# Altium PCB PCB1.PcbDoc
Units mm, origin at the board's own origin, x right, y up, seen from the top; angles counter-clockwise.
Board outline 57 x 66 mm, 2 copper layers (Top Layer, Bottom Layer); 36 components, 30 nets, 109 pads, 6 vias.
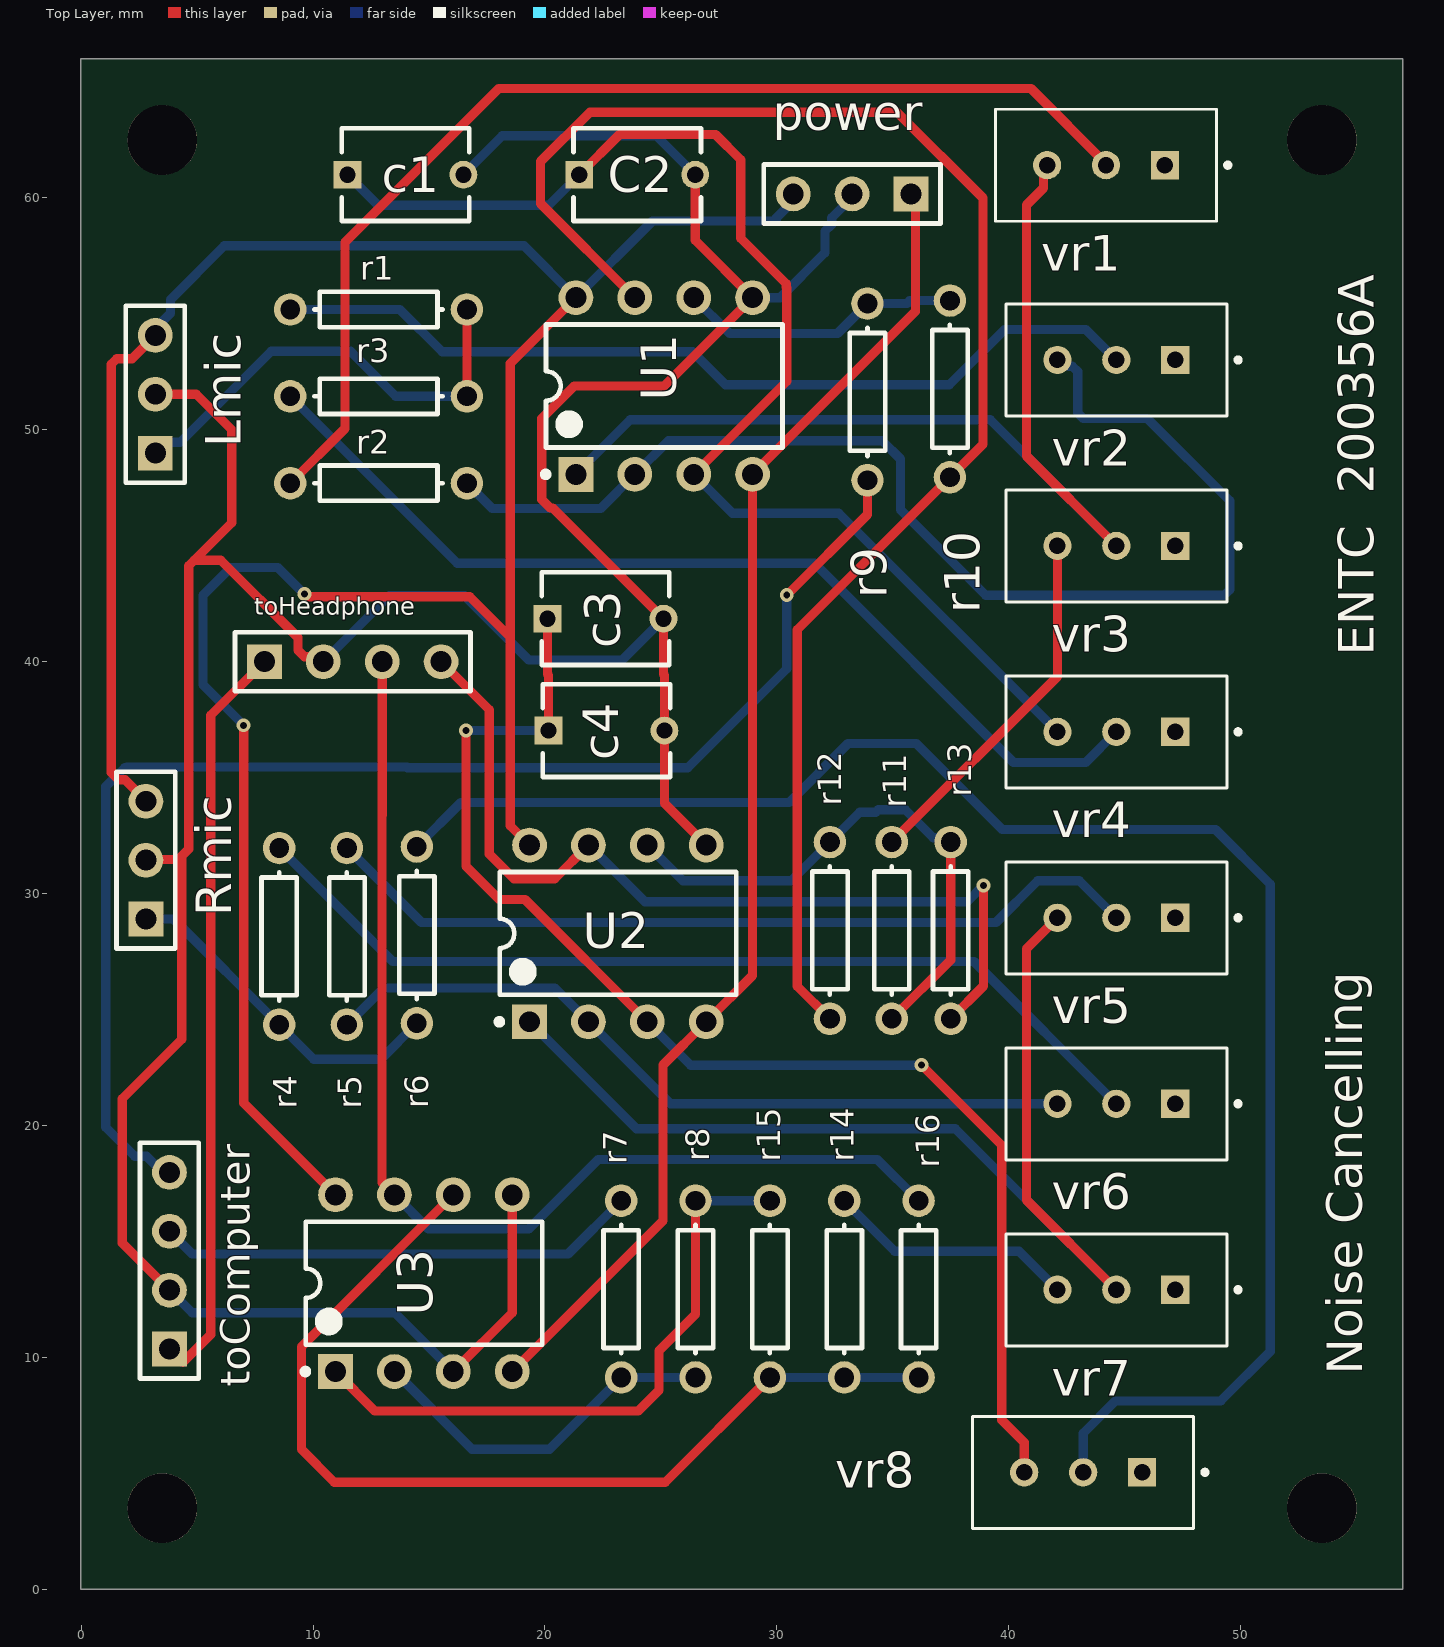
[diagram p0: Top Layer view]
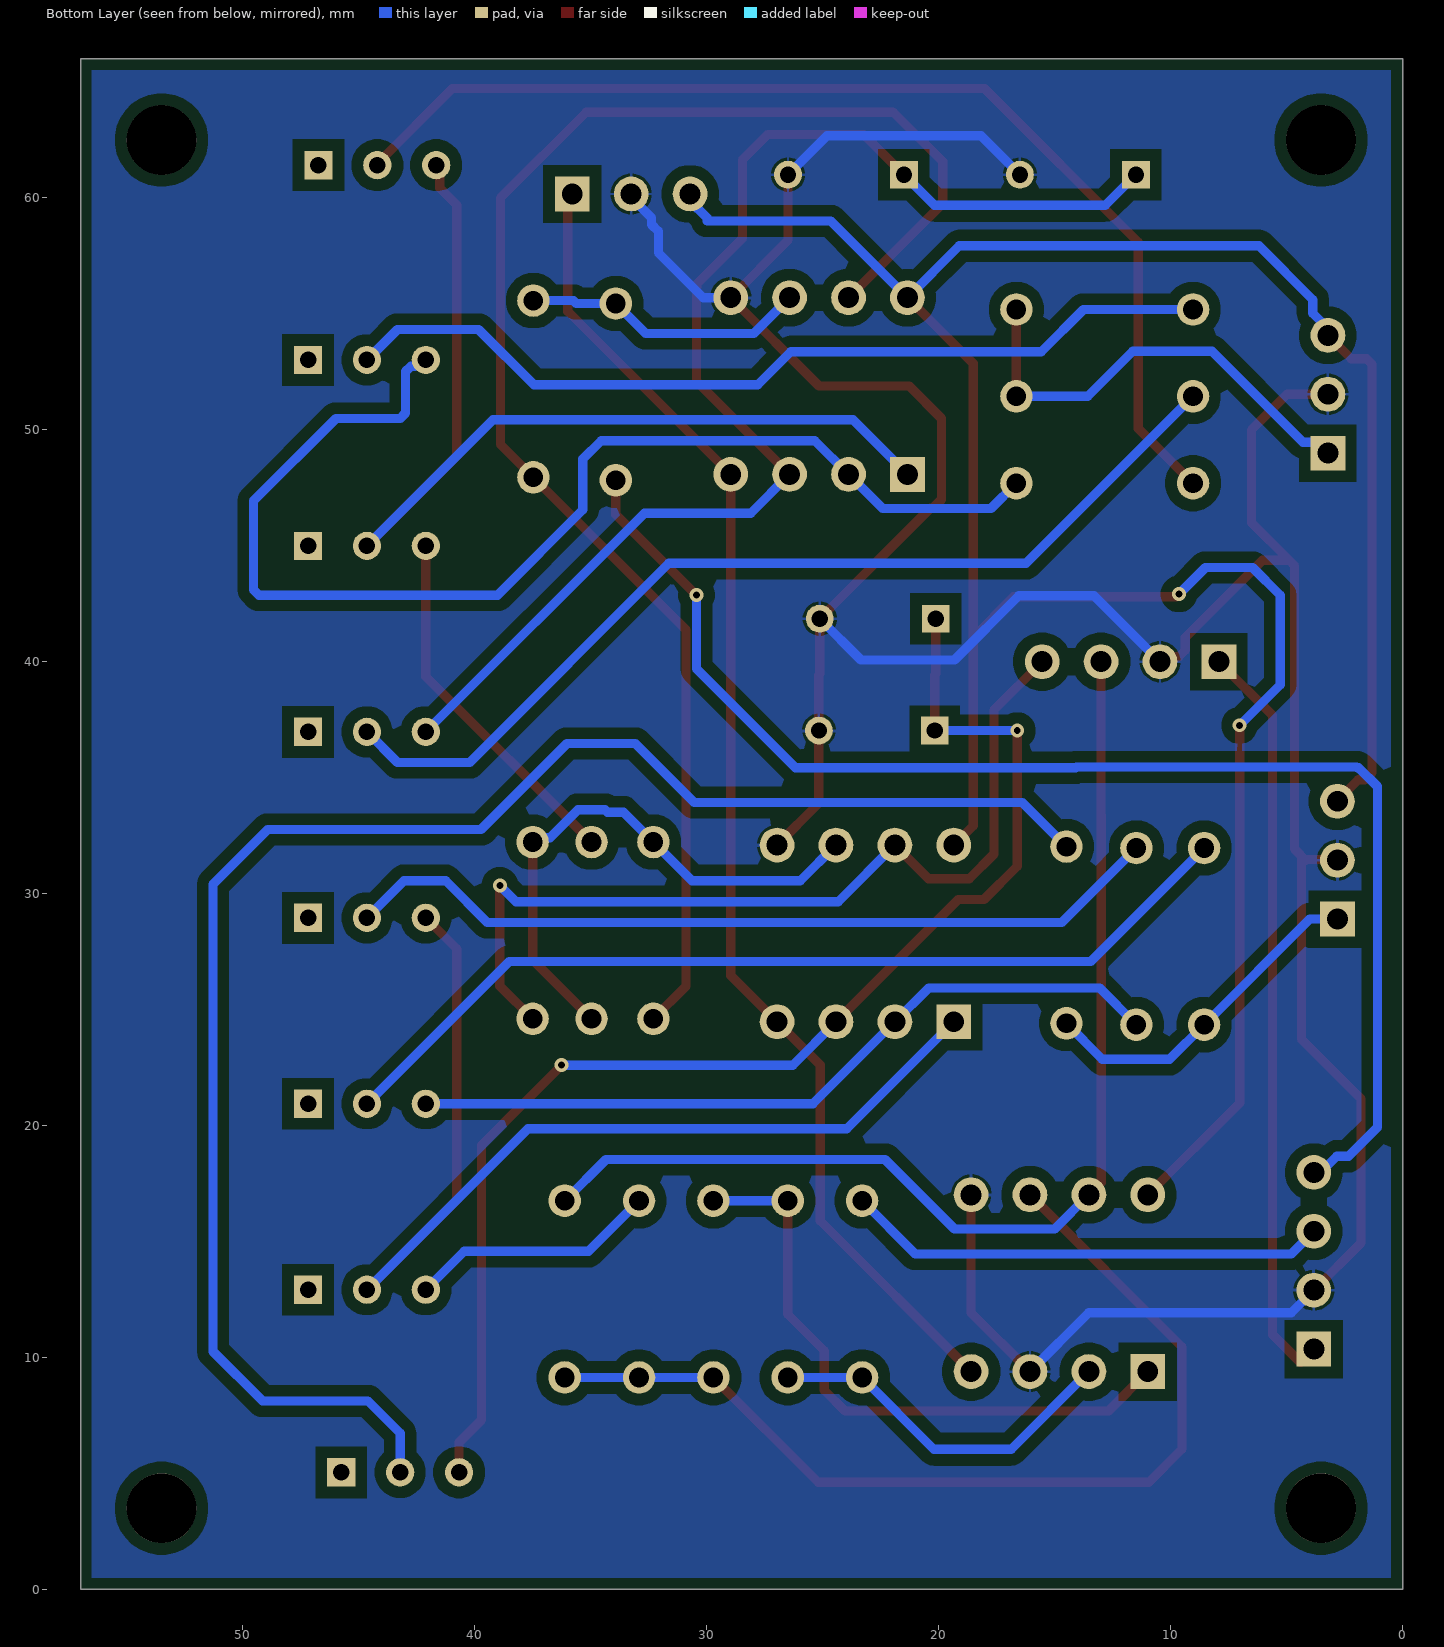
[diagram p1: Bottom Layer view, seen from below]

## Layer stack, top to bottom
Top Solder: solder mask 0.0102, Solder Resist, Dk 3.5
Top Layer: signal copper 0.0356
Dielectric 1: dielectric 0.32, FR-4, Dk 4.8
Bottom Layer: signal copper 0.0356
Bottom Solder: solder mask 0.0102, Solder Resist, Dk 3.5

## Board outline
-0.016,0.005 -0.016,66.005 56.984,66.005 56.984,0.005

## Design rules (kind name [scope] priority, off if disabled: settings)
BoardOutlineClearance [All] p1: gap=0.2 ignorepadtopadclearanceinfootprint=FALSE
Clearance [All] p1: gap=0.5 ignorepadtopadclearanceinfootprint=FALSE
ComponentClearance [All] p1: gap=0.127 collisioncheckmode=3 verticalgap=0.127 showdistances=TRUE
DiffPairsRouting [All] p1: maxlimit=0.254 minlimit=0.127 mostfreqgap=0.127 toplayer_minwidth=0.127 toplayer_maxwidth=25.4 toplayer_prefwidth=0.127 bottomlayer_minwidth=0.127 bottomlayer_maxwidth=25.4 bottomlayer_prefwidth=0.127 maxuncoupledlength=12.7
Height [All] p1: minheight=0 maxheight=1816.048 prefheight=12.7
HoleSize [All] p1: absolutevalues=TRUE maxlimit=6.3 minlimit=0.3 maxpercent=80.000 minpercent=20.000
HoleToHoleClearance [All] p1: gap=0.25 allowstackedmicrovias=FALSE
MinimumAnnularRing [All] p1: minimumring=0.076
MinimumSolderMaskSliver [All] p1: minsoldermaskwidth=0
PlaneClearance [All] p1: clearance=0.127
PlaneConnect PlaneConnectPowerPads [InPadClass('PowerPads')] p1: planeconnectstyle=Direct reliefexpansion=0.508 reliefentries=4 reliefconductorwidth=0.254 reliefairgap=0.254
PlaneConnect [All] p2: pad.planeconnectstyle=Relief pad.reliefexpansion=0.3 pad.reliefentries=4 pad.reliefconductorwidth=0.127 pad.reliefairgap=0.127 via.planeconnectstyle=Direct via.reliefexpansion=0.3 via.reliefentries=4 via.reliefconductorwidth=0.127 via.reliefairgap=0.127
PolygonConnect PolygonConnectPowerPads [All vs (InPadClass('PowerPads'))] p1: connectstyle=Direct reliefconductorwidth=0.254 reliefentries=4 polygonreliefangle="90 Angle" airgapwidth=0.254
PolygonConnect [All] p2: thpad.connectstyle=Relief thpad.reliefconductorwidth=0.127 thpad.reliefentries=4 thpad.polygonreliefangle="90 Angle" thpad.airgapwidth=0.127 smdpad.connectstyle=Relief smdpad.reliefconductorwidth=0.127 smdpad.reliefentries=4 smdpad.polygonreliefangle="90 Angle" smdpad.airgapwidth=0.127 via.connectstyle=Direct via.reliefconductorwidth=0.127 via.reliefentries=4 via.polygonreliefangle="90 Angle" via.airgapwidth=0.127
RoutingVias [All] p1: holewidth=0.3 width=0.6 viastyle="Through Hole" minholewidth=0.3 minwidth=0.6 maxholewidth=0.6 maxwidth=6.6
SilkToSilkClearance [All] p1: silktosilkclearance=0
SilkToSolderMaskClearance [IsPad] p1: minsilkscreentomaskgap=0.127 clearancetoexposedcopper=TRUE
SolderMaskExpansion [All] p1: expansion=0.075 istentingtop=FALSE
Width [All] p1: maxlimit=0.5 minlimit=0.127 preferedwidth=0.4
20 further rules are at their usual default settings.

## Components (designator, comment, footprint, x,y, rotation, side; value= is the part's Value field where it differs from the comment)
c1 "1nF" FP-RCE3M1-MFG 13.984,61.005 r0 top (schematic designator C1)
C2 "1nF" FP-RCE3M1-MFG 23.984,61.005 r0 top
c3 "1nF" FP-RCE3M1-MFG 22.614,41.859 r0 top (schematic designator C3)
c4 "1nF" FP-RCE3M1-MFG 22.654,37.033 r0 top (schematic designator C4)
Lmic "Header 3" HDR1X3 3.2,48.997 r90 top
power "Header 3" HDR1X3 35.789,60.173 r180 top
r1 "5k" AXIAL-0.3 12.827,55.194 r180 top
r2 "5k" AXIAL-0.3 12.827,47.701 r180 top
r3 "10k" AXIAL-0.3 12.827,51.448 r180 top
r4 "5k" AXIAL-0.3 8.541,28.159 r90 top
r5 "5k" AXIAL-0.3 11.462,28.159 r90 top
r6 "10k" AXIAL-0.3 14.478,28.219 r270 top
r7 "10k" AXIAL-0.3 23.289,12.95 r270 top
r8 "10k" AXIAL-0.3 26.496,12.95 r90 top
r9 "10k" AXIAL-0.3 33.909,51.638 r90 top
r10 "10k" AXIAL-0.3 37.465,51.765 r270 top
r11 "1k" AXIAL-0.3 34.957,28.415 r270 top
r12 "10k" AXIAL-0.3 32.29,28.415 r90 top
r13 "10k" AXIAL-0.3 37.497,28.415 r270 top
r14 "1k" AXIAL-0.3 32.909,12.95 r270 top
r15 "10k" AXIAL-0.3 29.703,12.95 r270 top
r16 "10k" AXIAL-0.3 36.116,12.95 r90 top
Rmic "Header 3" HDR1X3 2.794,28.905 r90 top
toComputer "Header 4" HDR1X4 3.81,10.363 r90 top
toHeadphone "Header 4" HDR1X4 7.904,40.005 r0 top
U1 "TL072CP" P0008A 25.146,51.892 r90 top
U2 "TL072CP" P0008A 23.146,28.286 r90 top
U3 "TL072CP" P0008A 14.78,13.204 r90 top
vr1 "5k" TRIM_3296W-1-250 44.196,61.417 r180 top (schematic designator VR1)
vr2 "5k" TRIM_3296W-1-250 44.641,53.017 r180 top (schematic designator VR2)
vr3 "500k" TRIM_3296W-1-250 44.641,44.998 r180 top (schematic designator VR3)
vr4 "3k" TRIM_3296W-1-250 44.641,36.979 r180 top (schematic designator VR4)
vr5 "5k" TRIM_3296W-1-250 44.641,28.96 r180 top (schematic designator VR5)
vr6 "5k" TRIM_3296W-1-250 44.641,20.94 r180 top (schematic designator VR6)
vr7 "500k" TRIM_3296W-1-250 44.641,12.921 r180 top (schematic designator VR7)
vr8 "3k" TRIM_3296W-1-250 43.21,5.048 r180 top (schematic designator VR8)

## Footprints (in the part's own frame and the unit in brackets; to place one, negate y for a bottom-side part, rotate by r counter-clockwise, add the part's x,y. Pads: shape width x height; smd on the part's side, far side on the other; paste and mask are expansions set on the pad)
AXIAL-0.3 [mm] "Axial Device, Thru-Hole; 2 Leads; 0.3 in Pin Spacing"
  round 1.4 hole 0.85: 1(-3.81,0) 2(3.81,0)
  silkscreen extent -2.77,-0.76 2.77,0.76
FP-RCE3M1-MFG [mm]
  rect 1.2x1.2 hole 0.7 paste-1000 mask+0: 1(-2.5,0)
  round 1.2 hole 0.7 paste-1000 mask+0: 2(2.5,0)
  silkscreen extent -2.75,-2 2.75,2, body extent -3.2,-2.1 3.2,2.1, height 0.25
HDR1X3 [mm] "Connector; Header; 3 Position"
  rect 1.5x1.5 hole 0.9: 1(0,0)
  round 1.5 hole 0.9: 2(2.54,0) 3(5.08,0)
  silkscreen extent -1.27,-1.27 6.35,1.27
HDR1X4 [mm] "Connector; Header; 4 Position"
  rect 1.5x1.5 hole 0.9: 1(0,0)
  round 1.5 hole 0.9: 2(2.54,0) 3(5.08,0) 4(7.62,0)
  silkscreen extent -1.27,-1.27 8.89,1.27
P0008A [mm] "DIP, 8-Leads, Body 10.15x6.6mm, Pitch 2.54mm"
  rect 1.5x1.5 hole 0.9: 1(-3.81,3.81)
  round 1.5 hole 0.9: 2(-3.81,1.27) 3(-3.81,-1.27) 4(-3.81,-3.81) 5(3.81,-3.81) 6(3.81,-1.27) 7(3.81,1.27) 8(3.81,3.81)
  silkscreen extent -3.93,-5.1 2.65,5.23, body extent -3.95,-5.07 3.95,5.07, height 5.08
TRIM_3296W-1-250 [mm]
  rect 1.218x1.218 / inner round 1.218 / far side rect 1.218x1.218 hole 0.71: 1(-2.54,0)
  round 1.218 hole 0.71: 2(0,0) 3(2.54,0)
  silkscreen extent -5.35,-2.41 4.76,2.42, body extent -4.76,-2.41 4.76,2.42, height 11.55

## Part data
c1 C2 c3 c4: library part CMP-06035-054025-1, "Cap Ceramic 10uF 25V X7R ±10% Radial 5mm +125°C Automotive Ammo Pack", Capacitance=10uF, Case/Package=Radial, Dielectric=X7R, Max Operating Temperature=125°C, Min Operating Temperature=-55°C, Package Quantity=500, Ratings=AEC-Q200, Resistor Type=Ceramic, Tolerance=10%, Voltage Rating=25V, Height=5mm, Height - Seated (Max)=0.197inch, Lead Diameter=0.5mm, Lead Pitch=0.197inch, Lead/Base Style="Formed Leads", Length=0.217inch, Mount="Through Hole", Packaging=Bulk, Termination=Radial, Voltage Rating (DC)=25V, Width=4mm
Lmic power Rmic: "Header, 3-Pin", LatestRevisionDate=17-Jul-2002, LatestRevisionNote="Re-released for DXP Platform.", Publisher="Altium Limited"
r1 r2 r3 r4 r5 r6 r7 r8 r9 r10 r11 r12 r13 r14 r15 r16: library part Res1, "Resistor", LatestRevisionDate=17-Jul-2002, LatestRevisionNote="Re-released for DXP Platform.", PackageDescription="Axial Device, Thru-Hole; 2 Leads; 0.3 in Pin Spacing", PackageReference=AXIAL-0.3, Published=8-Jun-2000, Publisher="Altium Limited"
toComputer toHeadphone: "Header, 4-Pin", LatestRevisionDate=17-Jul-2002, LatestRevisionNote="Re-released for DXP Platform.", Publisher="Altium Limited"
U1 U2 U3: library part CMP-0017-00950-2, "Dual Low-Noise JFET-Input General-Purpose Operational Amplifier, 7 to 36 V, 0 to 70 degC, 8-pin DIP (P8), Pb-Free (RoHS)", Manufacturer="Texas Instruments", Rating=Catalog, Total Supply Voltage(Max)(+5V is 5, +/-5V is 10)=36, Total Supply Voltage(Min)(+5V is 5, +/-5V is 10)=7, CMRR(Min)(dB)=70, Code_JEDEC=MS-001, ComponentLink1Description="Manufacturer URL", ComponentLink1URL=http://www.ti.com/, ComponentLink2Description=Datasheet, ComponentLink2URL=http://www.ti.com/lit/ds/symlink/tl072.pdf, ComponentLink3Description="Package Specification", ComponentLink3URL=http://www.ti.com/litv/pdf/mpdi001b, DatasheetVersion=SLOS080J, Eco-Plan="Pb-Free (RoHS)", GBW(Typ)(MHz)=3, IIB(Max)(pA)=200, Iq per channel(Max)(mA)=2.5, Mounting Technology="Through Hole", Number of Channels=2, Offset Drift(Typ)(uV/C)=18, PackageDescription="8-Pin Plastic In-Line, Body 9.59 x 6.35 mm, Pitch 2.54 mm", PackageReference=P0008A, PackageVersion="4040082/E, 04/2010", PartNumber=TL072CP, Slew Rate(Typ)(V/us)=13, Sub Family="General Purpose Amplifier, High Supply Voltage Amplifier (>=30V)", Vio (25C)(Max)(mV)=10, Vn at 1kHz(Typ)(nV/rtHz)=18
vr1 vr2 vr3 vr4 vr5 vr6 vr7 vr8: library part 3296W-1-250, "25 Ohms 0.5W, 1/2W PC Pins Through Hole Trimmer Potentiometer Cermet 25.0 Turn Top Adjustment", Package="NON STANDARD-3 Bourns", Availability="In Stock", Check_prices=https://www.snapeda.com/parts/3296W-1-250/Bourns/view-part/?ref=eda, MF=Bourns, MP=3296W-1-250, Price=None, Purchase-URL=https://pricing.snapeda.com/search/part/3296W-1-250/?ref=eda, SnapEDA_Link=https://www.snapeda.com/parts/3296W-1-250/Bourns/view-part/?ref=snap

## Free pads (board coordinates)
  round 3 hole 3: 6(3.5,3.5) 6(3.5,62.5) 6(53.5,3.5) 6(53.5,62.5)

## Via types
v1: diameter 0.6, hole 0.3, Top Layer to Bottom Layer, 6 vias

## Nets (pads, with @x,y where several pads share a name; then routed paths per layer and width w, separated by ;. In a path a pad name is that pad's centre, name@x,y a point inside that pad or via, vN(x,y) a via of type N, cw(c..) or ccw(c..) an arc to the next point about the centre after c; other vN are vias at no path point)
+Power: Lmic.3 power.3 Rmic.3 U1.8 U2.8 U3.8 | length 123.1
  Top Layer w0.4: Rmic.3 2.794,34.014 1.892,34.916 1.609,34.916 1.304,35.222 1.304,52.834 1.538,53.069 2.193,53.069 Lmic.3 ; v1@7.061,37.313 v1(7.01,37.262) 7.01,20.974 U3.8 ; v1(9.627,42.926) 9.754,42.799 16.764,42.799 18.5,41.063 ; U2.8 18.5,32.932 18.5,41.063 ; U1.8 18.5,52.866 18.5,41.063
  Bottom Layer w0.4: Lmic.3 3.2,54.374 3.852,55.026 3.852,55.617 6.172,57.937 19.101,57.937 U1.8 24.639,59.005 29.973,59.005 29.973,59.139 30.709,59.875 power.3 ; v1(7.01,37.262) 5.258,39.014 5.258,42.875 6.452,44.069 8.484,44.069 v1(9.627,42.926)
-Power: power.1 U1.4 U2.4 U3.4 | length 58.1
  Top Layer w0.4: U3.4 25.095,15.899 25.095,22.615 U2.4 28.956,26.476 U1.4 35.984,55.11 35.984,59.977 power.1
button: toComputer.1 toHeadphone.1 | length 32.5
  Top Layer w0.4: toComputer.1 4.386,9.787 5.588,10.989 5.588,37.689 toHeadphone.1
GND: c1.2 C2.2 c3.2 c4.2 Lmic.2 power.2 Rmic.2 toComputer.2 toHeadphone.2 U1.5 U2.5 U3.3 U3.5 | length 150.6
  Top Layer w0.4: Rmic.2 2.819,31.471 4.346,31.471 4.346,23.723 1.778,21.155 1.778,14.935 toComputer.2 ; Lmic.2 4.963,51.537 6.5,50 6.5,46 4.876,44.376 4.876,44.373 ; 4.16,31.448 4.642,31.93 4.642,44.139 4.876,44.373 ; toHeadphone.2 10.234,40.216 9.631,40.216 9.354,40.493 9.354,41.045 6.026,44.373 4.876,44.373 ; U3.3 18.59,11.934 U3.5 ; C2.2 26.484,58.174 U1.5 25.146,51.892 21.26,51.892 19.863,50.495 19.863,47.003 20.231,46.634 20.339,46.634 c3.2 25.114,39.461 25.154,39.421 c4.2 25.154,33.898 U2.5
  Bottom Layer w0.4: toComputer.2 4.788,11.925 13.519,11.925 U3.3 ; toHeadphone.2 13.289,42.85 16.535,42.85 19.304,40.081 23.336,40.081 c3.2 ; c1.2 18.166,62.687 24.802,62.687 C2.2 ; U1.5 30.141,55.702 32.074,57.635 32.074,58.566 32.368,58.861 32.368,59.144 33.249,60.024 power.2
L_APF_OUTPUT: U1.1 vr1.3 vr3.2 | length 44.9
  Top Layer w0.4: vr1.3 41.499,61.261 41.499,60.435 40.767,59.702 40.767,48.872 vr3.2
  Bottom Layer w0.4: U1.1 23.686,50.432 39.207,50.432 vr3.2
L_music_in: r9.1 toComputer.4 | length 59.3
  Top Layer w0.4: v1(30.429,42.875) 33.909,46.355 r9.1
  Bottom Layer w0.4: toComputer.4 3.512,17.983 2.818,18.677 2.312,18.677 1.067,19.922 1.067,34.62 1.88,35.433 1.937,35.433 1.965,35.461 14.05,35.461 14.077,35.433 26.162,35.433 30.429,39.7 v1(30.429,42.875)
L_music_inverted: r10.2 r12.1 U1.7 | length 68.3
  Top Layer w0.4: U1.7 19.812,59.766 19.812,61.57 21.946,63.703 35.18,63.703 38.887,59.996 38.887,49.378 r10.2 30.886,41.377 30.886,26.008 r12.1
L_OUT: r13.2 toHeadphone.4 U2.7 | length 39.1
  Top Layer w0.4: toHeadphone.4 17.6,37.929 17.6,31.715 18.669,30.646 20.426,30.646 U2.7 ; r13.2 38.913,26.02 v1(38.913,30.353)
  Bottom Layer w0.4: U2.7 24.316,29.656 38.216,29.656 v1(38.913,30.353)
Netc1_1: c1.1 C2.1 U1.3 vr4.3 | length 55.6
  Top Layer w0.4: C2.1 23.217,62.738 27.356,62.738 28.448,61.646 28.448,58.261 30.406,56.303 30.406,56.157 30.429,56.134 30.429,52.095 U1.3
  Bottom Layer w0.4: c1.1 12.799,59.69 20.169,59.69 C2.1 ; U1.3 28.092,46.406 32.674,46.406 vr4.3
Netc3_1: c3.1 c4.1 U2.3 vr8.3 | length 56.8
  Top Layer w0.4: v1(16.6,37.033) 16.6,31.18 18.034,29.746 19.146,29.746 U2.3 ; c3.1 20.114,39.461 20.154,39.421 c4.1 ; v1(36.246,22.606) 39.7,19.152 39.7,7.303 40.67,6.333 vr8.3
  Bottom Layer w0.4: v1(16.6,37.033) c4.1 ; U2.3 26.286,22.606 v1(36.246,22.606)
NetLmic_1: Lmic.1 r1.1 r3.1 | length 19.8
  Top Layer w0.4: r3.1 r1.1
  Bottom Layer w0.4: Lmic.1 3.67,49.466 4.279,49.466 8.204,53.391 11.62,53.391 13.564,51.448 r3.1
Netr1_2: r1.2 vr2.2 | length 38.5
  Bottom Layer w0.4: r1.2 13.741,55.194 15.57,53.365 26.365,53.365 27.788,51.943 37.44,51.943 39.827,54.331 43.327,54.331 vr2.2
Netr2_1: r2.1 U1.2 vr2.3 | length 53.5
  Bottom Layer w0.4: r2.1 17.729,46.609 22.403,46.609 U1.2 25.326,49.532 34.544,49.532 35.331,48.745 35.331,46.558 39.014,42.875 49.296,42.875 49.53,43.11 49.53,46.939 45.974,50.495 43.212,50.495 42.977,50.73 42.977,52.515 42.743,52.749 42.59,52.749 42.322,53.017 vr2.3
Netr2_2: r2.2 vr1.2 | length 48.3
  Top Layer w0.4: r2.2 11.379,50.063 11.379,58.09 18.009,64.719 40.958,64.719 44.196,61.481 vr1.2
Netr3_2: r3.2 vr4.2 | length 42.7
  Bottom Layer w0.4: r3.2 16.218,44.247 31.623,44.247 40.208,35.662 43.324,35.662 vr4.2
Netr4_1: r4.1 r6.2 Rmic.1 | length 14.8
  Bottom Layer w0.4: Rmic.1 3.985,28.905 r4.1 10.03,22.86 12.929,22.86 r6.2
Netr4_2: r4.2 vr6.2 | length 40.7
  Bottom Layer w0.4: r4.2 13.434,27.076 38.505,27.076 vr6.2
Netr5_1: r5.1 U2.2 vr6.3 | length 33.4
  Bottom Layer w0.4: r5.1 13.046,25.933 20.419,25.933 U2.2 25.412,20.941 vr6.3
Netr5_2: r5.2 vr5.2 | length 35.9
  Bottom Layer w0.4: r5.2 14.675,28.756 39.45,28.756 41.25,30.556 43.044,30.556 vr5.2
Netr6_1: r6.1 vr8.2 | length 72.5
  Bottom Layer w0.4: r6.1 16.383,33.934 30.531,33.934 33.071,36.474 36.017,36.474 39.726,32.766 48.92,32.766 51.283,30.404 51.283,10.262 49.149,8.128 44.602,8.128 43.21,6.736 vr8.2
Netr7_2: r7.2 r8.1 U3.2 | length 15.7
  Bottom Layer w0.4: U3.2 16.859,6.045 20.194,6.045 r7.2 r8.1
Netr9_2: r9.2 r10.1 U1.6 | length 12.3
  Bottom Layer w0.4: U1.6 27.965,54.153 32.614,54.153 r9.2 35.611,55.448 35.738,55.575 r10.1
Netr11_1: r11.1 vr3.3 | length 15.7
  Top Layer w0.4: r11.1 42.101,39.369 vr3.3
Netr11_2: r11.2 r12.2 r13.1 U2.6 | length 24.2
  Top Layer w0.4: r11.2 37.497,27.145 r13.1
  Bottom Layer w0.4: U2.6 25.956,30.556 30.622,30.556 33.582,33.517 34.269,33.517 34.377,33.625 35.537,33.625 36.746,32.416 37.306,32.416 r13.1
Netr14_1: r14.1 vr7.3 | length 10.8
  Bottom Layer w0.4: r14.1 35.09,14.58 40.443,14.58 vr7.3
Netr14_2: r14.2 r15.2 r16.1 U3.6 | length 42.8
  Top Layer w0.4: U3.6 9.5,10.464 9.5,6.045 10.922,4.623 25.185,4.623 r15.2
  Bottom Layer w0.4: r15.2 r14.2 r16.1
R_APF_OUTPUT: U2.1 vr5.3 vr7.2 | length 48.3
  Top Layer w0.4: vr5.3 40.767,27.626 40.767,16.795 vr7.2
  Bottom Layer w0.4: U2.1 23.949,19.863 37.7,19.863 vr7.2
R_music_in: r7.1 toComputer.3 | length 20.8
  Bottom Layer w0.4: toComputer.3 4.788,14.465 20.994,14.465 r7.1
R_music_inverted: r8.2 r15.1 U3.1 | length 27.1
  Top Layer w0.4: U3.1 12.668,7.696 24.028,7.696 24.917,8.585 24.917,10.287 26.496,11.865 r8.2
  Bottom Layer w0.4: r8.2 r15.1
R_OUT: r16.2 toHeadphone.3 U3.7 | length 48.4
  Top Layer w0.4: toHeadphone.3 12.984,33.38 12.979,33.376 12.979,17.545 U3.7
  Bottom Layer w0.4: U3.7 14.979,15.545 19.304,15.545 22.301,18.542 34.334,18.542 r16.2
pads on no net: vr1.1 vr2.1 vr3.1 vr4.1 vr5.1 vr6.1 vr7.1 vr8.1

## Polygon pours and split planes (outlines as drawn)
GND on Bottom Layer "GND_L02_P000" (solid, remove dead copper, pour order 0): 0.5,65.5 0.5,0.5 56.5,0.5 56.5,65.5

## Silkscreen, mask and mechanical layers (free items; w line width, h text height)
Top Overlay:
  text "200356A" at 55.746,47.254 h1.52 r90
  text "ENTC" at 55.746,40.254 h1.52 r90
  text "Noise Cancelling" at 55.238,9.254 h1.52 r90